# Altium PCB Robot_demoboard.PcbDoc
Units mm, origin at the board's own origin, x right, y up, seen from the top; angles counter-clockwise.
Board outline 125.98 x 47.24 mm, 2 copper layers (Top Layer, Bottom Layer); 74 components, 149 nets, 383 pads, 9 vias.
Unrouted connection lines stored in the file: 192.
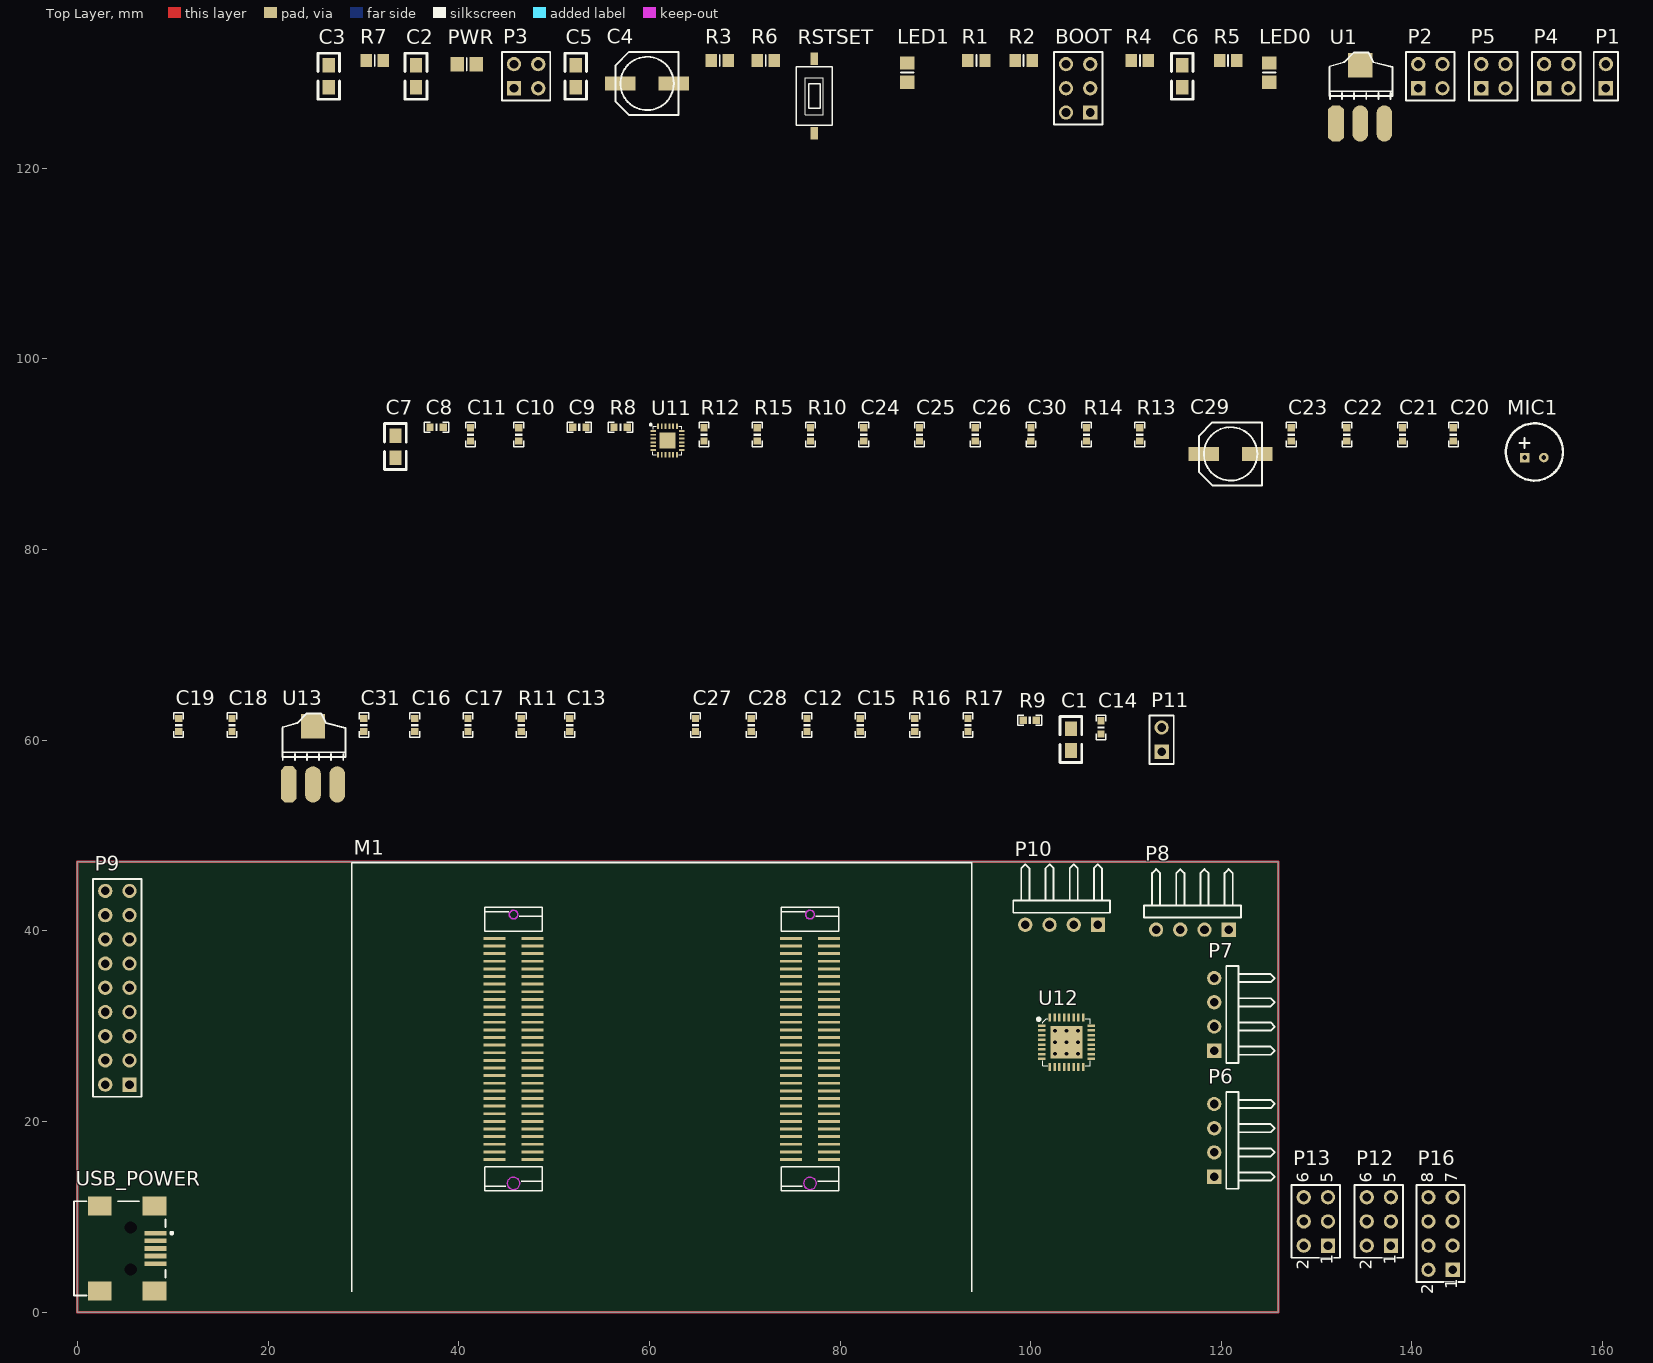
[diagram p0: Top Layer view]
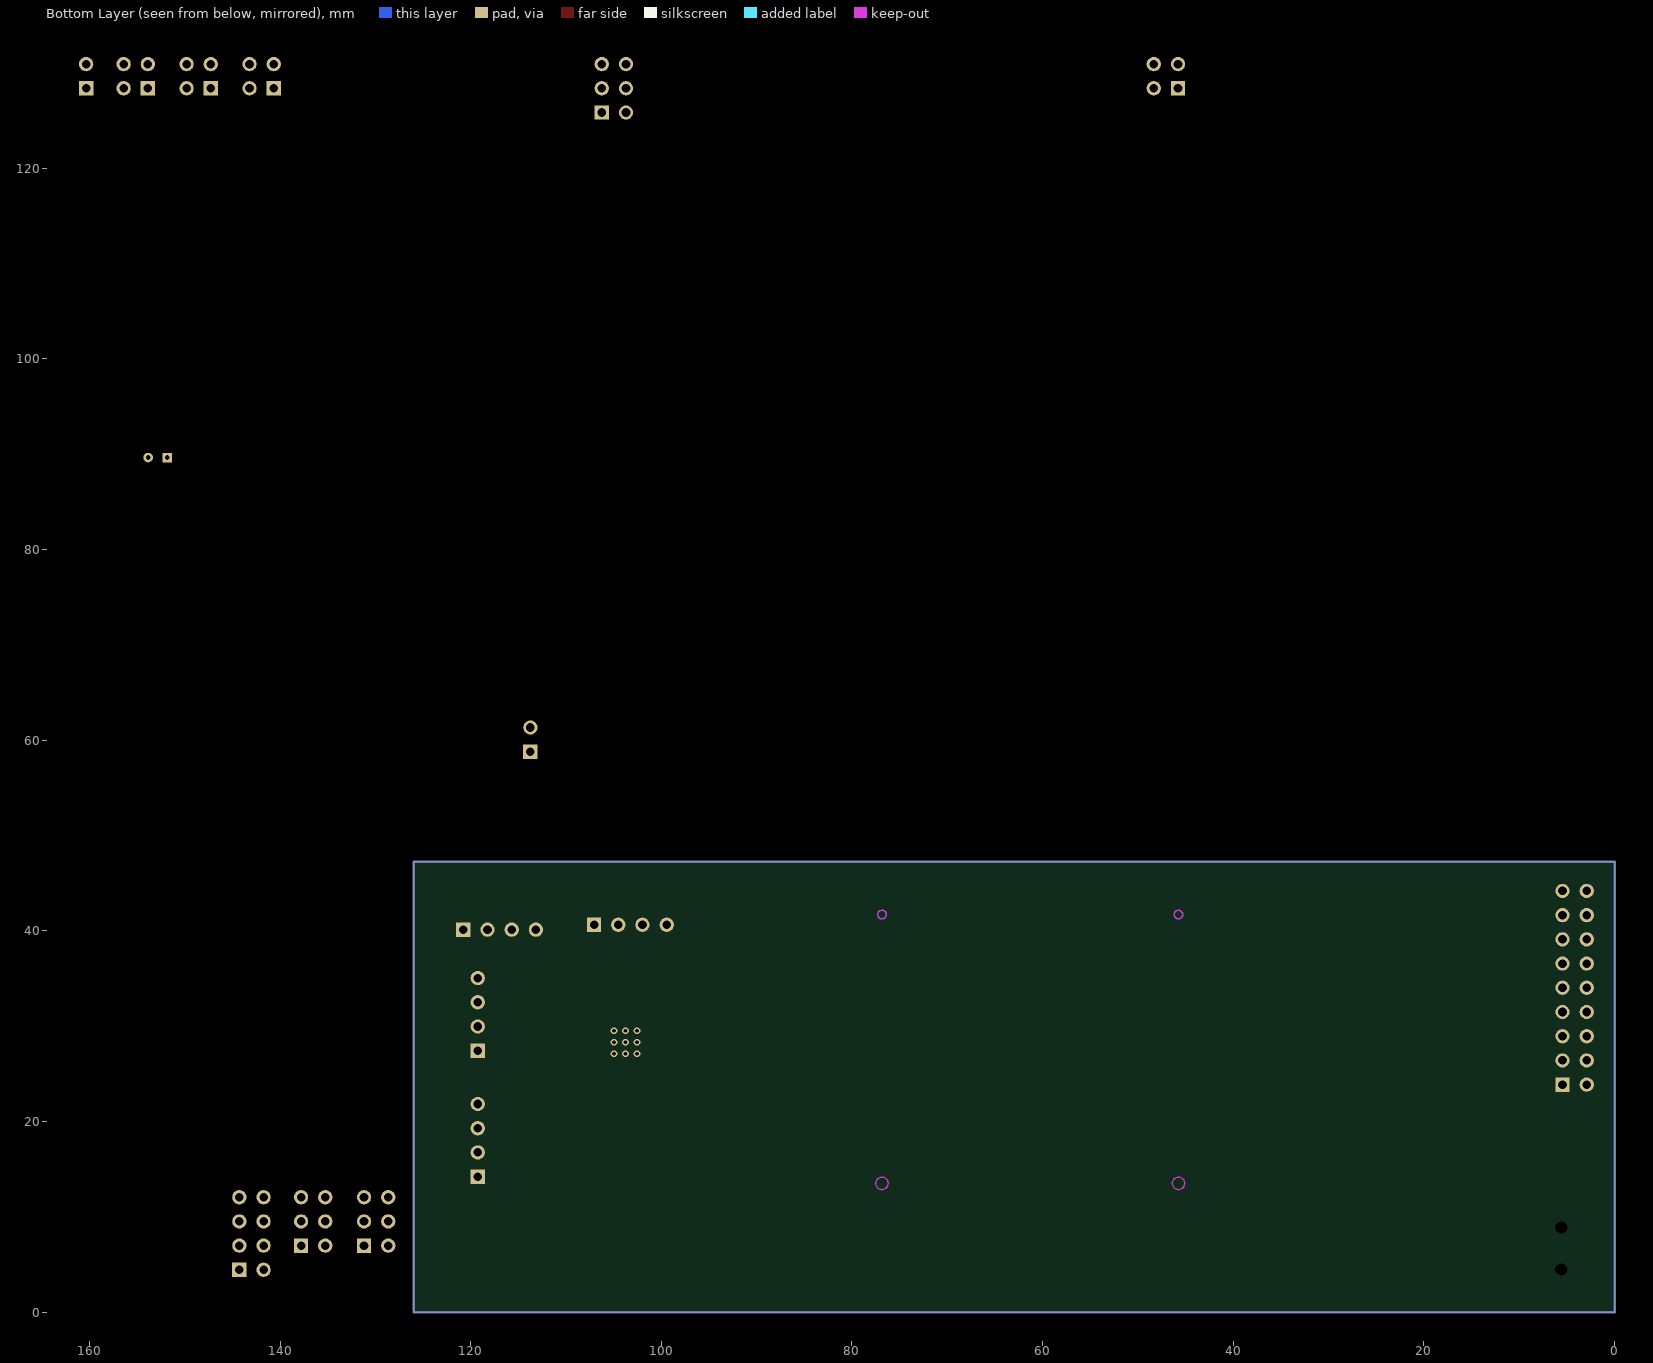
[diagram p1: Bottom Layer view, seen from below]

## Layer stack, top to bottom
Top Solder: solder mask 0.0102, Solder Resist, Dk 3.5
Top Layer: signal copper 0.0356
Dielectric 1: dielectric 0.32, FR-4, Dk 4.8
Bottom Layer: signal copper 0.0356
Bottom Solder: solder mask 0.0102, Solder Resist, Dk 3.5

## Board outline
0,0 125.984,0 125.984,47.244 0,47.244

## Design rules (kind name [scope] priority, off if disabled: settings)
Clearance [All] p1: gap=0.254 ignorepadtopadclearanceinfootprint=FALSE except(0: Arc-Hole Track-Hole SMDPad-Hole THPad-Hole Via-Hole Fill-Hole Poly-Hole Region-Hole Text-Hole)
PolygonConnect [All] p1: connectstyle=Relief reliefconductorwidth=0.254 reliefentries=4 polygonreliefangle="90 Angle" airgapwidth=0.254
RoutingVias [All] p1: holewidth=0.711 width=1.27 viastyle="Through Hole" minholewidth=0.711 minwidth=1.27 maxholewidth=0.711 maxwidth=1.27
SolderMaskExpansion [All] p1: expansion=0.102
Width [All] p1: maxlimit=0.254 minlimit=0.254 preferedwidth=0.254
30 further rules are at their usual default settings.

## Components (designator, comment, footprint, x,y, rotation, side; value= is the part's Value field where it differs from the comment)
BOOT "Header 3X2" HDR2X3 106.247,125.857 r90 top
C1 "104" 0805 104.215,58.928 r90 top
C2 "104" 0805 35.508,128.524 r90 top
C3 "104" 0805 26.364,128.524 r90 top
C4 "220uF" CC6.56.5 59.765,128.905 r0 top
C5 "104" 0805 52.272,128.524 r90 top
C6 "104" 0805 115.899,128.524 r90 top
C7 "104" 0805 33.349,89.662 r90 top
C8 "104" 0603P 37.667,92.837 r0 top
C9 "104" 0603P 52.653,92.837 r0 top
C10 "104" 0603P 46.303,92.075 r90 top
C11 "10uF" 0603P 41.223,92.075 r90 top
C12 "10uF" 0603P 76.529,61.595 r90 top
C13 "104" 0603P 51.637,61.595 r90 top
C14 "104" 0603P 107.39,61.341 r90 top
C15 "10uF" 0603P 82.117,61.595 r90 top
C16 "10uF" 0603P 35.381,61.595 r90 top
C17 "104" 0603P 40.969,61.595 r90 top
C18 "1uF" 0603P 16.204,61.595 r90 top
C19 "1uF" 0603P 10.616,61.595 r90 top
C20 "1uF" 0603P 144.347,92.075 r90 top
C21 "1uF" 0603P 139.013,92.075 r90 top
C22 "104" 0603P 133.171,92.075 r90 top
C23 "104" 0603P 127.329,92.075 r90 top
C24 "10uf" 0603P 82.498,92.075 r90 top
C25 "10uf" 0603P 88.34,92.075 r90 top
C26 "221" 0603P 94.182,92.075 r90 top
C27 "102" 0603P 64.845,61.595 r90 top
C28 "101" 0603P 70.687,61.595 r90 top
C29 "220uF" CC6.56.5 120.979,90.043 r0 top
C30 "104" 0603P 100.024,92.075 r90 top
C31 "104" 0603P 30.047,61.595 r90 top
LED0 "LED1" 6-0805_M 125.043,130.048 r90 top
LED1 "LED1" 6-0805_M 87.07,130.048 r90 top
M1 "STM32F4&F7_CB" STM32F4&F7_CB 43.752,16.015 r0 top
MIC1 "MIC" MIC-6022 151.84,89.662 r0 top
P1 "VREF_SEL" HDR1X2 160.349,128.397 r90 top
P2 "USART1" HDR2X2 140.664,128.397 r0 top
P3 "USART2" HDR2X2 45.795,128.397 r0 top
P4 "USART3" HDR2X2 153.872,128.397 r0 top
P5 "UART5" HDR2X2 147.268,128.397 r0 top
P6 "GPS" HDR1X4H 119.253,14.224 r90 top
P7 "SCREEN" HDR1X4H 119.253,27.432 r90 top
P8 "SENSOR" HDR1X4H 120.777,40.132 r180 top
P9 "CAMERA" HDR2X9 5.461,23.876 r90 top
P10 "WIFI" HDR1X4H 107.061,40.64 r180 top
P11 "Header2" HDR1X2 113.74,58.801 r90 top
P12 "Right_foot" HDR2X3 137.795,6.985 r90 top
P13 "Left_foot" HDR2X3 131.191,6.985 r90 top
P16 "Header 4X2" HDR2X4 144.272,4.445 r90 top
PWR "LED1" 6-0805_M 40.842,130.937 r0 top
R1 "Res2" 6-0805_N 94.309,131.318 r0 top value=10K
R2 "Res2" 6-0805_N 99.262,131.318 r0 top value=10K
R3 "Res2" 6-0805_N 67.385,131.318 r0 top value=10R
R4 "Res2" 6-0805_N 111.454,131.318 r0 top value=10K
R5 "Res2" 6-0805_N 120.725,131.318 r0 top value=510R
R6 "Res2" 6-0805_N 72.211,131.318 r0 top value=510R
R7 "Res2" 6-0805_N 31.19,131.318 r0 top value=510R
R8 "10R" 0603P 56.971,92.837 r0 top
R9 "0R" 0603P 99.897,62.103 r0 top
R10 "10K" 0603P 76.91,92.075 r90 top
R11 "10R" 0603P 46.557,61.595 r90 top
R12 "0R" 0603P 65.734,92.075 r90 top
R13 "0R" 0603P 111.454,92.075 r90 top
R14 "680R" 0603P 105.866,92.075 r90 top
R15 "47K" 0603P 71.322,92.075 r90 top
R16 "4.7K" 0603P 87.832,61.595 r90 top
R17 "47K" 0603P 93.42,61.595 r90 top
RSTSET "KEY_M" KEY_SOP3625 77.291,123.698 r90 top
U1 "AMS1117-3.3" AMS1117 132.028,124.714 r0 top
U11 "MPU9250" QFN24-t 60.4,92.456 r0 top
U12 "WM8978" qfn32 103.759,28.321 r0 top
U13 "AMS1117-3.3" AMS1117 22.173,55.372 r0 top
USB_POWER "USB-B(Mini)" USB/SM0.8-6H5 0.338,6.69 r180 top

## Footprints (in the part's own frame and the unit in brackets; to place one, negate y for a bottom-side part, rotate by r counter-clockwise, add the part's x,y. Pads: shape width x height; smd on the part's side, far side on the other; paste and mask are expansions set on the pad)
6-0805_M [mm] "Chip Resistor, Body 2.0x1.2mm, IPC Low Density"
  rect 1.4x1.5 smd: 1(-1,0) 2(1,0)
  silkscreen extent 0,-0.65 0,0.65, body extent -1.07,-0.7 1.07,0.7, height 0.7
6-0805_N [mm] "Chip Resistor, Body 2.0x1.2mm, IPC Medium Density"
  rect 1.2x1.4 smd: 1(-0.9,0) 2(0.9,0)
  silkscreen extent 0,-0.6 0,0.6, body extent -1.07,-0.7 1.07,0.7, height 0.7
0603P [mil]
  rect 30x30 smd: 1(-27,0) 2(27.5,-0.06)
  silkscreen extent -50,-20 50,20
0805 [mil]
  rect 60x50 smd: 1(0,-0.06) 2(90,-0.06)
  silkscreen extent -50,-45 140,45
AMS1117 [mil]
  oct 65x150 smd: 1(0.03,-0.06)
  oval 65x150 smd: 2(100.03,-0.06) 3(200.03,-0.06)
  rect 100x100 smd: 4(100.03,239.94)
  silkscreen extent -26,100 234,293
CC6.56.5 [mm]
  rect 3.2x1.5 smd: 1(-2.794,0) 2(2.8,0)
  silkscreen extent -3.3,-3.3 3.3,3.3
HDR1X2 [mm]
  rect 1.5x1.5 hole 0.9: 1(0,0)
  round 1.5 hole 0.9: 2(2.54,0)
  silkscreen extent -1.27,-1.27 3.81,1.27
HDR1X4H [mm] "Connector; Header; 4 Position; Right Angle"
  rect 1.5x1.5 hole 0.9: 1(0,0)
  round 1.5 hole 0.9: 2(2.54,0) 3(5.08,0) 4(7.62,0)
  silkscreen extent -1.27,-6.35 8.89,-1.27
HDR2X2 [mm]
  rect 1.5x1.5 hole 0.9: 1(0,0)
  round 1.5 hole 0.9: 2(0,2.54) 3(2.54,0) 4(2.54,2.54)
  silkscreen extent -1.27,-1.27 3.81,3.81
HDR2X3 [mm]
  rect 1.5x1.5 hole 0.9: 1(0,0)
  round 1.5 hole 0.9: 2(0,2.54) 3(2.54,0) 4(2.54,2.54) 5(5.08,0) 6(5.08,2.54)
  silkscreen extent -1.27,-1.27 6.35,3.81
HDR2X4 [mm] "Connector; Header; 4x2 Position"
  rect 1.5x1.5 hole 0.9: 1(0,0)
  round 1.5 hole 0.9: 2(0,2.54) 3(2.54,0) 4(2.54,2.54) 5(5.08,0) 6(5.08,2.54) 7(7.62,0) 8(7.62,2.54)
  silkscreen extent -1.27,-1.27 8.89,3.81
HDR2X9 [mm]
  rect 1.5x1.5 hole 0.9: 1(0,0)
  round 1.5 hole 0.9: 2(0,2.54) 3(2.54,0) 4(2.54,2.54) 5(5.08,0) 6(5.08,2.54) 7(7.62,0) 8(7.62,2.54) 9(10.16,0) 10(10.16,2.54) 11(12.7,0) 12(12.7,2.54) 13(15.24,0) 14(15.24,2.54) 15(17.78,0) 16(17.78,2.54) 17(20.32,0) 18(20.32,2.54)
  silkscreen extent -1.27,-1.27 21.59,3.81
KEY_SOP3625 [mm]
  rect 1.3x0.8 smd: 1(0,0) 2(7.8,0)
  silkscreen extent 0.85,-1.9 6.95,1.9
MIC-6022 [mm]
  rect 1x1 hole 0.5: 1(0,0)
  round 1 hole 0.5: 2(2,0)
  silkscreen extent -1.98,-2.41 4.01,3.58
QFN24-t [mm]
  rrect50% 0.6x0.2 smd: 1(0,0) 2(0,-0.4) 3(0,-0.8) 4(0,-1.2) 5(0,-1.6) 6(0,-2) 13(3,-2) 14(3,-1.6) 15(3,-1.2) 16(3,-0.8) 17(3,-0.4) 18(3,0)
  rrect50% 0.2x0.6 smd: 7(0.5,-2.5) 8(0.9,-2.5) 9(1.3,-2.5) 10(1.7,-2.5) 11(2.1,-2.5) 12(2.5,-2.5) 19(2.5,0.5) 20(2.1,0.5) 21(1.7,0.5) 22(1.3,0.5) 23(0.9,0.5) 24(0.5,0.5)
  rect 1.7x1.7 smd: 25(1.499,-1.003)
  silkscreen extent -0.36,-2.5 3,0.76
qfn32 [mm]
  rect 0.8x0.25 smd: 1(-2.601,1.75) 2(-2.601,1.25) 3(-2.601,0.75) 4(-2.601,0.25) 5(-2.601,-0.25) 6(-2.601,-0.75) 7(-2.601,-1.25) 8(-2.601,-1.75) 17(2.601,-1.75) 18(2.601,-1.25) 19(2.601,-0.75) 20(2.601,-0.25) 21(2.601,0.25) 22(2.601,0.75) 23(2.601,1.25) 24(2.601,1.75)
  rect 0.25x0.8 smd: 9(-1.75,-2.601) 10(-1.25,-2.601) 11(-0.75,-2.601) 12(-0.25,-2.601) 13(0.25,-2.601) 14(0.75,-2.601) 15(1.25,-2.601) 16(1.75,-2.601) 25(1.75,2.601) 26(1.25,2.601) 27(0.75,2.601) 28(0.25,2.601) 29(-0.25,2.601) 30(-0.75,2.601) 31(-1.25,2.601) 32(-1.75,2.601)
  rect 3.4x3.4 smd: 33(0,0)
  silkscreen extent -3.06,-2.49 2.49,2.55
STM32F4&F7_CB [mm]
  rect 2.3x0.3 smd: J1_1(0,0) J1_2(0,0.8) J1_3(0,1.6) J1_4(0,2.4) J1_5(0,3.2) J1_6(0,4) J1_7(0,4.8) J1_8(0,5.6) J1_9(0,6.4) J1_10(0,7.2) J1_11(0,8) J1_12(0,8.8) J1_13(0,9.6) J1_14(0,10.4) J1_15(0,11.2) J1_16(0,12) J1_17(0,12.8) J1_18(0,13.6) J1_19(0,14.4) J1_20(0,15.2) J1_21(0,16) J1_22(0,16.8) J1_23(0,17.6) J1_24(0,18.4) J1_25(0,19.2) J1_26(0,20) J1_27(0,20.8) J1_28(0,21.6) J1_29(0,22.4) J1_30(0,23.2) J1_31(4,23.2) J1_32(4,22.4) J1_33(4,21.6) J1_34(4,20.8) J1_35(4,20) J1_36(4,19.2) J1_37(4,18.4) J1_38(4,17.6) J1_39(4,16.8) J1_40(4,16) J1_41(4,15.2) J1_42(4,14.4) J1_43(4,13.6) J1_44(4,12.8) J1_45(4,12) J1_46(4,11.2) J1_47(4,10.4) J1_48(4,9.6) J1_49(4,8.8) J1_50(4,8) J1_51(4,7.2) J1_52(4,6.4) J1_53(4,5.6) J1_54(4,4.8) J1_55(4,4) J1_56(4,3.2) J1_57(4,2.4) J1_58(4,1.6) J1_59(4,0.8) J1_60(4,0) J2_1(31.1,0.001) J2_2(31.1,0.801) J2_3(31.1,1.601) J2_4(31.1,2.401) J2_5(31.1,3.201) J2_6(31.1,4.001) J2_7(31.1,4.801) J2_8(31.1,5.601) J2_9(31.1,6.401) J2_10(31.1,7.201) J2_11(31.1,8.001) J2_12(31.1,8.801) J2_13(31.1,9.601) J2_14(31.1,10.401) J2_15(31.1,11.201) J2_16(31.1,12.001) J2_17(31.1,12.801) J2_18(31.1,13.601) J2_19(31.1,14.401) J2_20(31.1,15.201) J2_21(31.1,16.001) J2_22(31.1,16.801) J2_23(31.1,17.601) J2_24(31.1,18.401) J2_25(31.1,19.201) J2_26(31.1,20.001) J2_27(31.1,20.801) J2_28(31.1,21.601) J2_29(31.1,22.401) J2_30(31.1,23.201) J2_31(35.1,23.201) J2_32(35.1,22.401) J2_33(35.1,21.601) J2_34(35.1,20.801) J2_35(35.1,20.001) J2_36(35.1,19.201) J2_37(35.1,18.401) J2_38(35.1,17.601) J2_39(35.1,16.801) J2_40(35.1,16.001) J2_41(35.1,15.201) J2_42(35.1,14.401) J2_43(35.1,13.601) J2_44(35.1,12.801) J2_45(35.1,12.001) J2_46(35.1,11.201) J2_47(35.1,10.401) J2_48(35.1,9.601) J2_49(35.1,8.801) J2_50(35.1,8.001) J2_51(35.1,7.201) J2_52(35.1,6.401) J2_53(35.1,5.601) J2_54(35.1,4.801) J2_55(35.1,4.001) J2_56(35.1,3.201) J2_57(35.1,2.401) J2_58(35.1,1.601) J2_59(35.1,0.801) J2_60(35.1,0.001)
  Keep-Out Layer circle w0.152: c2,25.7 r0.45
  Keep-Out Layer circle w0.152: c2,-2.5 r0.65
  Keep-Out Layer circle w0.152: c33.1,-2.499 r0.65
  Keep-Out Layer circle w0.152: c33.1,25.701 r0.45
  silkscreen extent -14.95,-13.87 50.05,31.13
USB/SM0.8-6H5 [mm]
  rect 2.3x0.5 smd: 1(-7.85,-1.6) 2(-7.85,-0.8) 3(-7.85,0) 4(-7.85,0.8) 5(-7.85,1.6)
  rect 2.5x2 smd: 6(-7.75,4.45) 7(-1.996,4.45) 8(-7.75,-4.45) 9(-1.996,-4.45)
  round 0.6 hole 1.27 unplated: MH1(-5.25,2.2) MH2(-5.25,-2.2)
  silkscreen extent -9.68,-4.95 0.7,4.95

## Part data
BOOT: "Header, 3-Pin, Dual row", LatestRevisionDate=17-Jul-2002, LatestRevisionNote="Re-released for DXP Platform.", Publisher="Altium Limited"
C1 C2 C3 C5 C6 C7 C8 C9 C10 C11 C12 C13 C14 C15 C16 C17 C18 C19 C20 C21 C22 C23 C24 C25 C26 C27 C28 C30 C31: library part C
C4 C29: library part CAP
LED0 LED1 PWR: library part LED2, "Typical RED, GREEN, YELLOW, AMBER GaAs LED", PackageDocument=Feb-2002, LatestRevisionDate=17-Jul-2002, LatestRevisionNote="Re-released for DXP Platform.", PackageReference=3.2X1.6X1.1, Published=8-Jun-2000, Publisher="Altium Limited"
M1: "F429/746 Core Board"
P1 P11: library part "Header 2", "Header, 2-Pin", LatestRevisionDate=17-Jul-2002, LatestRevisionNote="Re-released for DXP Platform.", Publisher="Altium Limited"
P2 P3 P4 P5: library part "Header 2X2", "Header, 2-Pin, Dual row", LatestRevisionDate=17-Jul-2002, LatestRevisionNote="Re-released for DXP Platform.", Publisher="Altium Limited"
P6 P7 P8 P10: library part "Header 4H", "Header, 4-Pin, Right Angle", LatestRevisionDate=17-Jul-2002, LatestRevisionNote="Re-released for DXP Platform.", Publisher="Altium Limited"
P9: library part "Header 9X2", "Header, 9-Pin, Dual row", LatestRevisionDate=17-Jul-2002, LatestRevisionNote="Re-released for DXP Platform.", Publisher="Altium Limited"
P12 P13: library part "Header 3X2", "Header, 3-Pin, Dual row", LatestRevisionDate=17-Jul-2002, LatestRevisionNote="Re-released for DXP Platform.", Publisher="Altium Limited"
P16: "Header, 4-Pin, Dual row", LatestRevisionDate=17-Jul-2002, LatestRevisionNote="Re-released for DXP Platform.", Publisher="Altium Limited"
R1 R2 R3 R4 R5 R6 R7: "Resistor", LatestRevisionDate=17-Jul-2002, LatestRevisionNote="Re-released for DXP Platform.", PackageDescription="Axial Device, Thru-Hole; 2 Leads; 0.4 in Pin Spacing", PackageReference=AXIAL-0.4, Published=8-Jun-2000, Publisher="Altium Limited"
R8 R9 R10 R11 R12 R13 R14 R15 R16 R17: library part R
U1 U13: library part AMS1117
U11: "9轴运动处理传感器"
U12: "24bit ADC&DAC"
USB_POWER: library part USB5

## Via types
v1: diameter 0.7, hole 0.4, Top Layer to Bottom Layer, 9 vias

## Nets (pads, with @x,y where several pads share a name; then routed paths per layer and width w, separated by ;. In a path a pad name is that pad's centre, name@x,y a point inside that pad or via, vN(x,y) a via of type N, cw(c..) or ccw(c..) an arc to the next point about the centre after c; other vN are vias at no path point)
9D_INT: M1.J1_33 U11.12
AGND: C14.2 C15.2 C24.1 C25.1 C26.1 R12.2 R15.1 U12.28
BOOT0: M1.J1_31 R1.1
BOOT1: M1.J1_55 R2.2
DCMI_D0: M1.J2_16 P9.8
DCMI_D1: M1.J2_17 P9.9
DCMI_D2: M1.J2_18 P9.10
DCMI_D3: M1.J2_19 P9.11
DCMI_D4: M1.J1_39 P9.12
DCMI_D5: M1.J1_36 P9.13
DCMI_D6: M1.J1_26 P9.14
DCMI_D7: M1.J1_27 P9.15
DCMI_HREF: M1.J2_3 P9.5
DCMI_PCLK: M1.J1_47 P9.16
DCMI_PWDN: M1.J1_34 P9.18
DCMI_RESET: M1.J1_41 P9.7
DCMI_SCL: M1.J1_22 P9.4
DCMI_SDA: M1.J1_21 P9.6
DCMI_VSYNC: M1.J1_25 P9.3
DCMI_XCLK: M1.J2_20 P9.17
GND: BOOT.5 BOOT.6 C1.1 C2.1 C3.2 C4.2 C5.1 C6.1 C7.1 C8.1 C9.1 C10.1 C11.1 C12.1 C13.1 C16.1 C17.1 C27.1 C28.1 C29.2 C30.1 C31.1 M1.J1_1 M1.J1_30 M1.J2_31 P6.4 P7.4 P8.4 P9.2 P10.4 P12.6 P13.6 PWR.2 R10.1 R12.1 R13.1 RSTSET.2 U1.1 U11.9 U11.11 U11.18 U11.20 U12.12 U12.24 U12.33 U13.2 USB_POWER.5
  other v1: 102.559,27.121 103.759,27.121 104.959,27.121 102.559,28.321 103.759,28.321 104.959,28.321 102.559,29.521 103.759,29.521 104.959,29.521
GPS(RX): P3.3 P6.2
GPS(TX): P3.4 P6.3
IIC_SCL: M1.J1_8 U11.23 U12.16
IIC_SDA: M1.J1_7 U11.24 U12.17
LED0: LED0.2 M1.J1_57
LED1: LED1.2 M1.J1_56
left_1: M1.J1_46 P12.2
left_2: M1.J1_48 P12.3
left_3: M1.J1_51 P12.4
left_4: M1.J1_52 P12.5
NetBOOT_3: BOOT.3 R1.2
NetBOOT_4: BOOT.4 R2.1
NetC2_2: C2.2 P1.2 R3.1
NetC8_2: C8.2 U11.10
NetC9_2: C9.2 C10.2 C11.2 R8.1 U11.1 U11.22
NetC12_2: C12.2 C13.2 R9.1 U12.26
NetC16_2: C16.2 C17.2 R11.2 U12.13 U12.14
NetC18_1: C18.1 U12.1
NetC18_2: C18.2 C20.2 C26.2 MIC1.1 R14.2 R15.2
NetC19_1: C19.1 U12.2
NetC19_2: C19.2 C21.2 MIC1.2 R13.2
NetC20_1: C20.1 U12.4
NetC21_1: C21.1 U12.5
NetC22_1: C22.1 U12.19
NetC23_1: C23.1 U12.20
NetC24_2: C24.2 U12.27
NetC25_2: C25.2 R14.1 U12.32
NetC27_2: C27.2 R16.2 R17.1
NetC28_2: C28.2 P11.1 R17.2
NetLED0_1: LED0.1 R5.1
NetLED1_1: LED1.1 R6.1
NetPWR_1: PWR.1 R7.1
NetR10_2: R10.2 U12.18
PA0: M1.J2_42
PA1: M1.J1_3 P13.2
PA2: M1.J1_4 P13.3
PA3: M1.J1_44 R16.1
PA4: M1.J1_45 P13.5
PA11: M1.J1_53
PA12: M1.J1_54
PA13: M1.J1_43
PA14: M1.J1_42
PB5: M1.J1_23
PB6: M1.J1_24
PB10: M1.J2_2 P2.2
PB11: M1.J2_1 P2.1
PB12: M1.J2_4
PB13: M1.J2_5
PB14: M1.J2_6
PB15: M1.J2_7
PC1: M1.J1_9
PC4: M1.J1_49
PC5: M1.J1_50 P13.4
PC10: M1.J1_40
PC12: M1.J1_38 P5.1
PC13: M1.J1_28
PD0: M1.J2_47
PD1: M1.J2_48
PD2: M1.J1_37 P5.2
PD4: M1.J2_26
PD5: M1.J2_22 P3.1
PD6: M1.J2_27 P3.2
PD7: M1.J1_35
PD8: M1.J2_58 P4.1
PD9: M1.J2_59 P4.2
PD10: M1.J2_60
PD11: M1.J2_23
PD12: M1.J2_21
PD13: M1.J2_14 M1.J2_15
PD14: M1.J2_45
PD15: M1.J2_46
PE0: M1.J2_43
PE1: M1.J2_44
PE2: M1.J1_20 U12.11
PE3: M1.J1_19 U12.9
PE4: M1.J1_18 U12.7
PE5: M1.J1_17 U12.8
PE6: M1.J1_16 U12.10
PE7: M1.J2_49
PE8: M1.J2_50
PE9: M1.J2_51
PE10: M1.J2_52
PE11: M1.J2_53
PE12: M1.J2_54
PE13: M1.J2_55
PE14: M1.J2_56
PE15: M1.J2_57
PF6: M1.J1_14
PF7: M1.J1_13
PF8: M1.J1_12
PF9: M1.J1_11
PG3: M1.J2_13
PG11: M1.J2_35
PG12: M1.J2_25
PG14: M1.J1_32
PH2: M1.J1_5
PH3: M1.J1_6
PH6: M1.J2_8
PH7: M1.J2_9
PH9: M1.J2_10
PH10: M1.J2_11
PH11: M1.J2_12
PH12: M1.J2_24
PH13: M1.J2_30
PH14: M1.J2_29
PH15: M1.J2_28
PI0: M1.J2_34
PI1: M1.J2_33
PI2: M1.J2_32
PI3: M1.J2_41
PI4: M1.J2_36
PI5: M1.J2_37
PI6: M1.J2_38
PI7: M1.J2_39
PI8: M1.J2_40
PI11: M1.J1_15
PWM_AUDIO: C22.2 C23.2 P11.2
RESET: C3.1 M1.J1_10 R4.1 RSTSET.1
Screen(RX): P5.4 P7.2
SCREEN(TX): P5.3 P7.3
Sensor(RX): P2.4 P8.2
Sensor(TX): P2.3 P8.3
VCC3.3: BOOT.1 BOOT.2 C4.1 C5.2 C7.2 P9.1 R3.2 R4.2 R5.2 R6.2 R7.2 R8.2 R11.1 U1.2 U1.4
VCC3.3A: C14.1 C15.1 C29.1 C30.2 U12.31 U13.1 U13.3
VCC5: C1.2 C6.2 C31.2 M1.J1_58 M1.J1_59 M1.J1_60 P6.1 P7.1 P8.1 P10.1 P12.1 P13.1 R9.2 U1.3 U13.4 USB_POWER.1
VREF+: M1.J1_2 P1.1
WIFI(RX): P4.3 P10.2
WIFI(TX): P4.4 P10.3
pads on no net: M1.J1_29 P16.1 P16.2 P16.3 P16.4 P16.5 P16.6 P16.7 P16.8 U11.2 U11.3 U11.4 U11.5 U11.6 U11.7 U11.8 U11.13 U11.14 U11.15 U11.16 U11.17 U11.19 U11.21 U11.25 U12.3 U12.6 U12.15 U12.21 U12.22 U12.23 U12.25 U12.29 U12.30 USB_POWER.2 USB_POWER.3 USB_POWER.4 USB_POWER.6 USB_POWER.7 USB_POWER.8 USB_POWER.9 USB_POWER.MH1 USB_POWER.MH2

## Other copper
Multi-Layer:
  the board outline again, w0.254

## Text inside footprints (layer, text, board x,y; h text height)
P12: Top Overlay "6" at 135.763,13.589 h1.27 r90; Top Overlay "5" at 138.303,13.589 h1.27 r90; Top Overlay "2" at 135.763,4.445 h1.27 r90; Top Overlay "1" at 138.303,4.953 h1.27 r90
P13: Top Overlay "6" at 129.159,13.589 h1.27 r90; Top Overlay "5" at 131.699,13.589 h1.27 r90; Top Overlay "2" at 129.159,4.445 h1.27 r90; Top Overlay "1" at 131.699,4.953 h1.27 r90
P16: Top Overlay "2" at 142.24,1.905 h1.27 r90; Top Overlay "1" at 144.78,2.413 h1.27 r90; Top Overlay "7" at 144.78,13.589 h1.27 r90; Top Overlay "8" at 142.24,13.589 h1.27 r90